# Altium PCB 2015_CONNECTEUR_BALISE.PcbDoc
Units mil, origin at the board's own origin, x right, y up, seen from the top; angles counter-clockwise.
Board outline 900 x 885 mil, 4 copper layers (1-TOP, 2-SIGNAL, 3-GND, 4-BOT), stack 68 mil thick; 7 components, 6 nets, 12 pads, 17 vias.
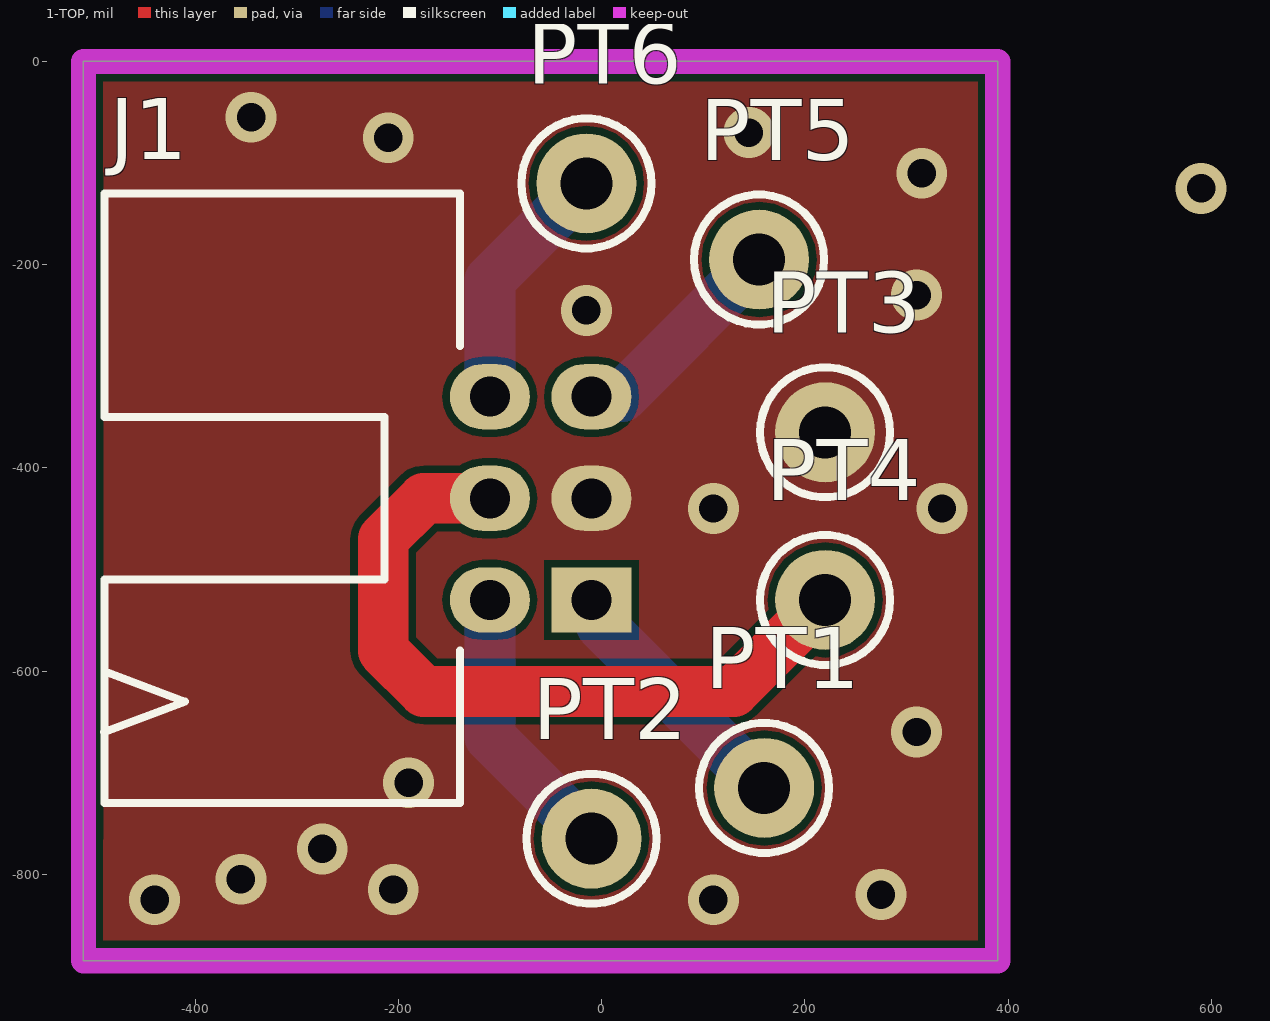
[diagram p0: 1-TOP view]
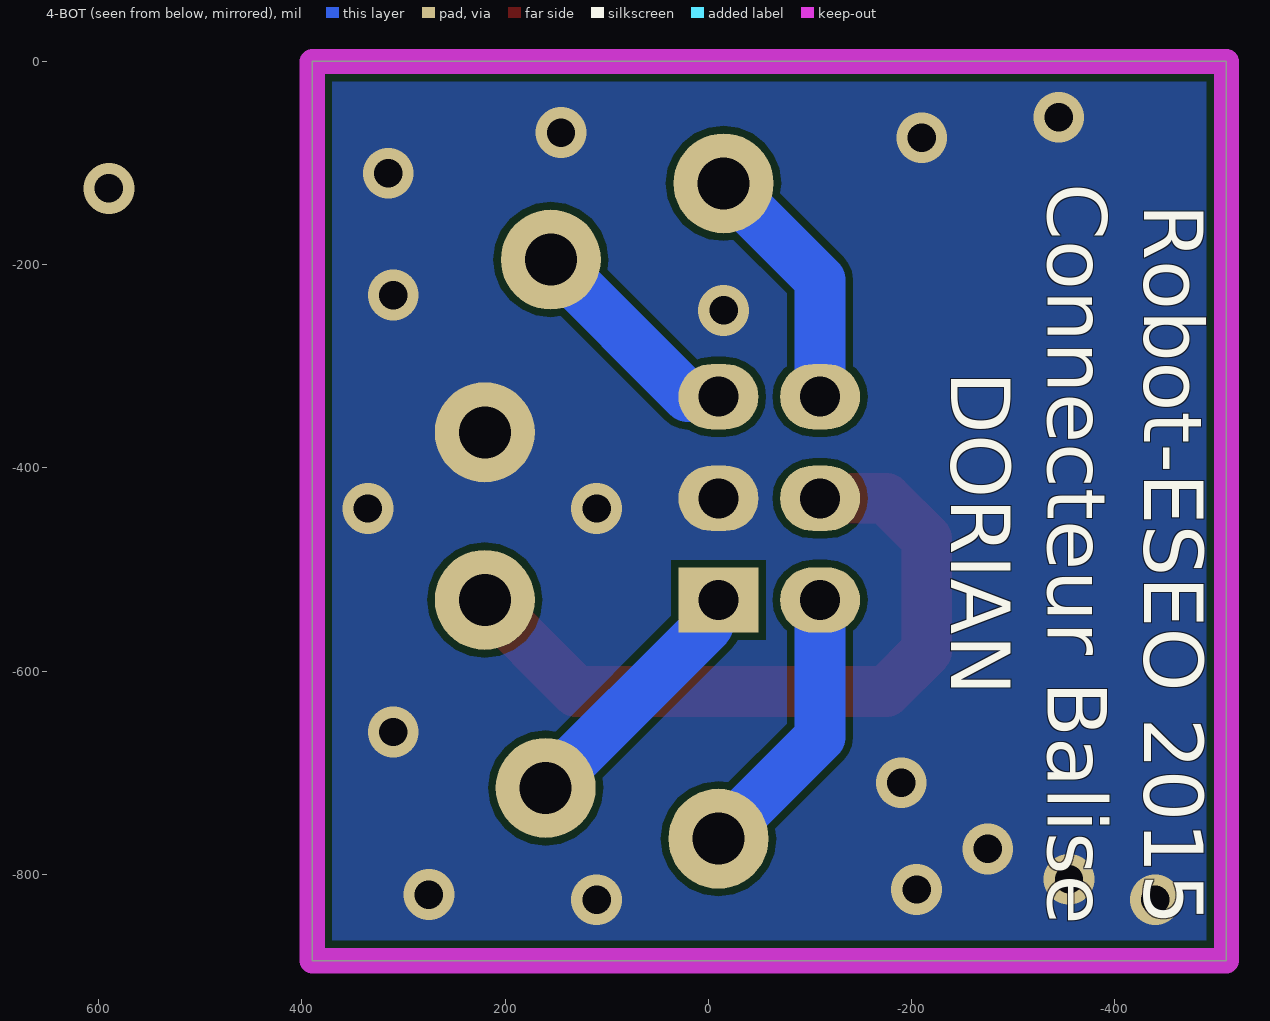
[diagram p1: 4-BOT view, seen from below]
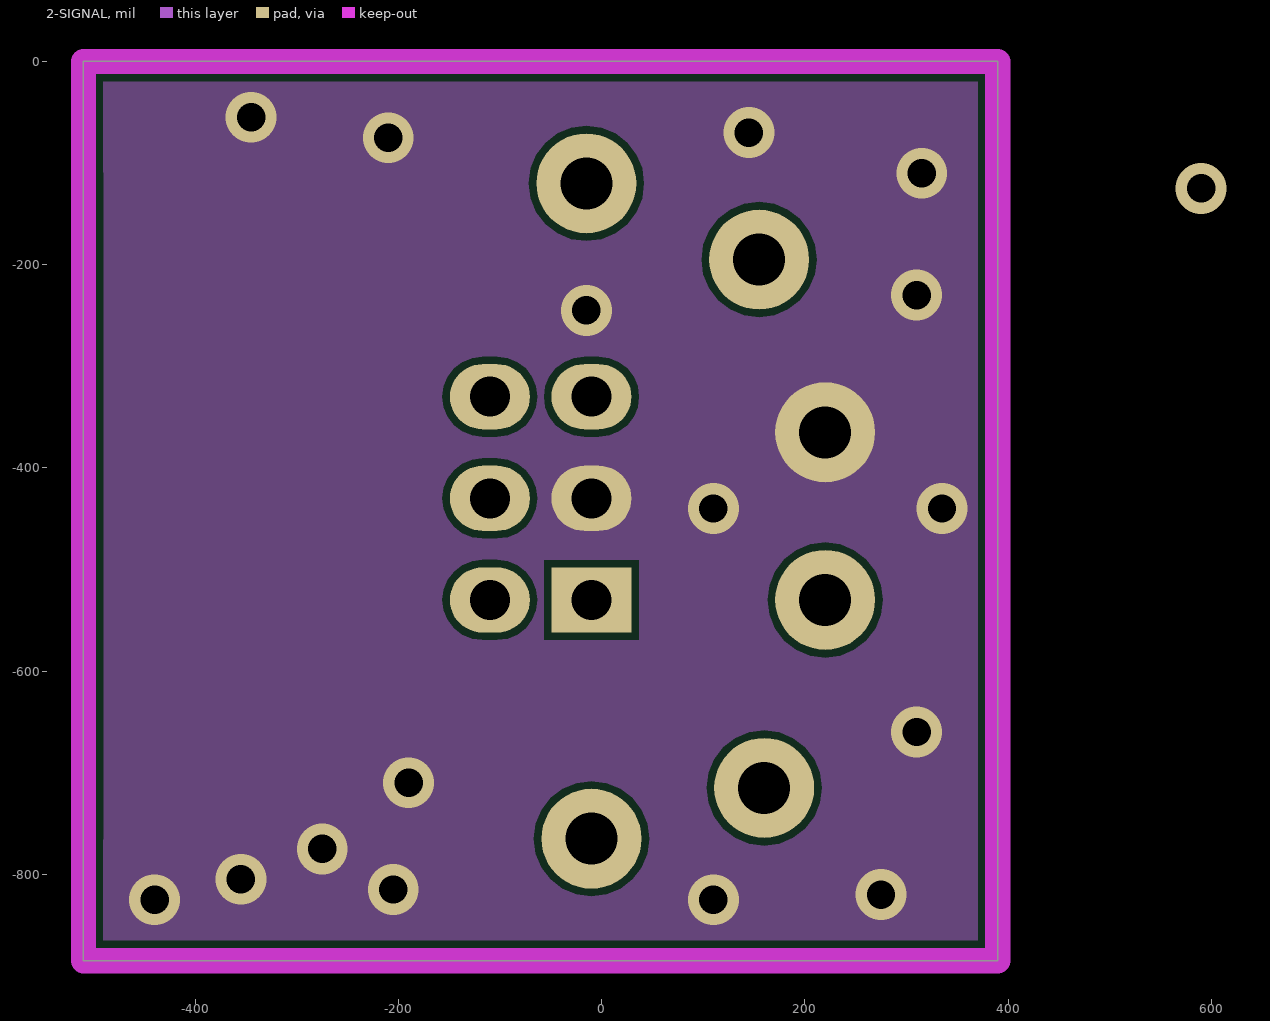
[diagram p2: 2-SIGNAL]
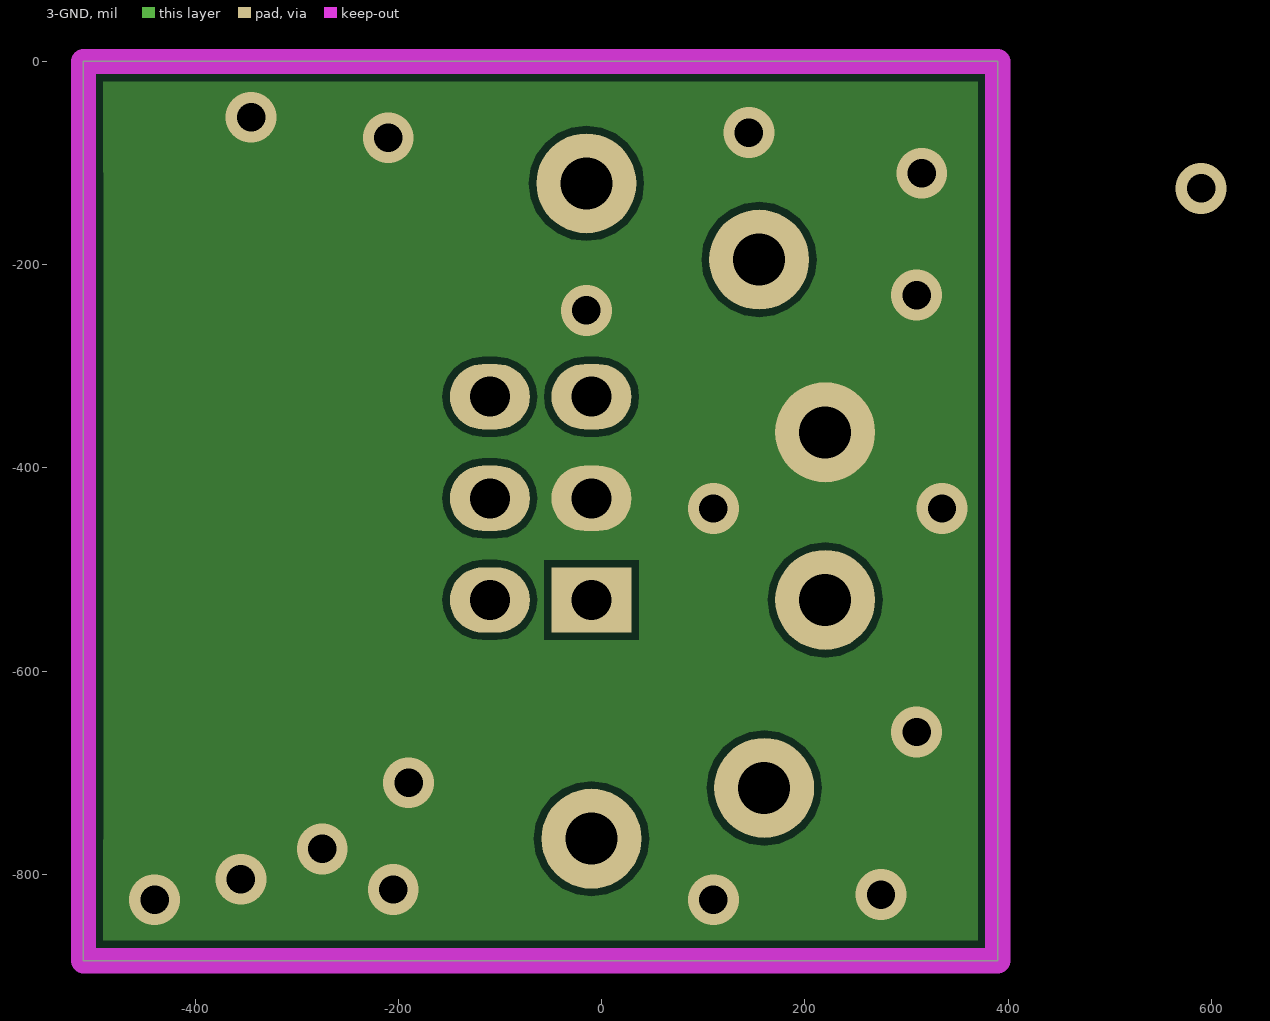
[diagram p3: 3-GND]

## Layer stack, top to bottom
1-TOP: signal copper 1.4
Dielectric: core 20.8, FR-4, Dk 4.8
2-SIGNAL: signal copper 1.4
Dielectric: prepreg 20.8, FR-4, Dk 4.8
3-GND: signal copper 1.4
Dielectric: core 20.8, FR-4, Dk 4.8
4-BOT: signal copper 1.4

## Board outline
-510,-885 390,-885 390,0 -510,0

## Design rules (kind name [scope] priority, off if disabled: settings)
Clearance Clearance_4 [InNamedPolygon('GND_TOP') Or  InNamedPolygon('3-GND') Or  InNamedPolygon('2-GND') Or  InNamedPolygon('4-GND')] p1: gap=15
Clearance Clearance_3 [InNamedPolygon('4-GND') Or  InNamedPolygon('GND_TOP') Or  InNamedPolygon('2-GND') Or  InNamedPolygon('3-GND')] p2: gap=10
Clearance Clearance_2 [InNamedPolygon('4-GND') Or  InNamedPolygon('2-GND') Or  InNamedPolygon('3-GND') Or  InNamedPolygon('1-GND') Or  InNamedPolygon('2-GND24')] p3: gap=10
Clearance Clearance_1 [InNamedPolygon('2-GND') Or  InNamedPolygon('3-GND') Or  InNamedPolygon('1-GND') Or  InNamedPolygon('4-GND')] p4: gap=10
Clearance [All] p5: gap=7
FabricationTestpoint [(IsPad And (OnTopLayer Or OnBottomLayer))] p1: side=3 testpointundercomponent=TRUE minsize=40 maxsize=100 preferedsize=60 minholesize=0 maxholesize=40 preferedholesize=32 testpointgrid=1 allowsidetop=TRUE allowsidebottom=TRUE usegrid=TRUE gridtolerance=0.01
HoleSize [All] p1: absolutevalues=TRUE maxlimit=200 minlimit=1 maxpercent=80.000 minpercent=20.000
PlaneConnect [All] p1: planeconnectstyle=Direct reliefexpansion=20 reliefentries=4 reliefconductorwidth=10 reliefairgap=10
PolygonConnect [All] p1: connectstyle=Direct reliefconductorwidth=10 reliefentries=4 polygonreliefangle="90 Angle"
RoomDefinition 2015_CONNECTEUR_BALISE [InComponentClass('2015_CONNECTEUR_BALISE')] p1: confinementstyle=ConfineIn formatcopy=TRUE lockcomponents=FALSE outline 420,-860 2425,-860 2425,-220 420,-220
RoutingVias [All] p1: holewidth=28 width=50 viastyle="Through Hole" minholewidth=28 minwidth=50 maxholewidth=28 maxwidth=50
SilkscreenOverComponentPads [IsPad] p1: minsilkscreentomaskgap=10
SolderMaskExpansion [All] p1: expansion=4
Width [All] p1: maxlimit=200 minlimit=10 preferedwidth=15
24 further rules are at their usual default settings.

## Components (designator, comment, footprint, x,y, rotation, side; value= is the part's Value field where it differs from the comment)
J1 "HE10/6_MALE_COUDE" HE10/6_M_C -10,-530 r90 top
PT1 "POINT_TEST" POINT_TEST 160,-715 r0 top
PT2 "POINT_TEST" POINT_TEST -10,-765 r0 top
PT3 "POINT_TEST" POINT_TEST 220,-365 r0 top
PT4 "POINT_TEST" POINT_TEST 220,-530 r0 top
PT5 "POINT_TEST" POINT_TEST 155,-195 r0 top
PT6 "POINT_TEST" POINT_TEST -15,-120 r0 top

## Footprints (in the part's own frame and the unit in brackets; to place one, negate y for a bottom-side part, rotate by r counter-clockwise, add the part's x,y. Pads: shape width x height; smd on the part's side, far side on the other; paste and mask are expansions set on the pad)
HE10/6_M_C [mm] "HE10 ; 6 CONTACTS ; MALE ; COUDE ; ESPACEMENTS BROCHES = 2.54 mm"
  rect 1.63x2 hole 1: 1(0,0)
  oval 1.63x2 hole 1: 2(0,2.54) 3(2.54,0) 4(2.54,2.54) 5(5.08,0) 6(5.08,2.54)
  silkscreen extent -5.08,3.29 10.16,12.19
POINT_TEST [mm] "PASTILLE TRAVERSANTE ; DIAMETRE = 2.5 mm ; DIAMETRE PERCAGE = 1.3 mm"
  round 2.5 hole 1.3: 1(0,0)
  silkscreen extent -1.63,-1.62 1.63,1.62, body extent -1.24,-1.27 1.3,1.27, height 5.94

## Part data
J1: "EMBASE HE10/6 MALE COUDE"
PT1 PT2 PT3 PT4 PT5 PT6: "POINT TEST"

## Via types
v1: diameter 50, hole 28, 1-TOP to 4-BOT, 17 vias

## Nets (pads, with @x,y where several pads share a name; then routed paths per layer and width w, separated by ;. In a path a pad name is that pad's centre, name@x,y a point inside that pad or via, vN(x,y) a via of type N, cw(c..) or ccw(c..) an arc to the next point about the centre after c; other vN are vias at no path point)
GND: J1.3 PT3.1
  other v1: -440,-825 110,-825 275,-820 -205,-815 -355,-805 -275,-775 -190,-710 310,-660 110,-440 335,-440 310,-230 315,-110 -210,-75 145,-70 -345,-55
NetJ1_1: J1.1 PT1.1 | length 251.3
  4-BOT w50: J1.1@0,-530 0,-555 PT1.1
NetJ1_2: J1.2 PT2.1 | length 281.4
  4-BOT w50: J1.2@-110,-525 J1.2 -110,-665 PT2.1
NetJ1_4: J1.4 PT4.1 | length 720.4
  1-TOP w50: J1.4 -175,-430 -215,-470 -215,-580 -175,-620 130,-620 PT4.1
NetJ1_5: J1.5 PT5.1 | length 225.9
  4-BOT w50: J1.5@-15,-330 J1.5 20,-330 PT5.1
NetJ1_6: J1.6 PT6.1 | length 244.4
  4-BOT w50: J1.6@-110,-325 -110,-215 PT6.1
copper on no net:
  other v1: -15,-245 590,-125

## Polygon pours and split planes (outlines as drawn)
GND on 1-TOP "1-TOP-No Net" (solid, pour order 9): -510,-885 390,-885 390,0 -510,0
GND on 2-SIGNAL "1-TOP-No Net1" (solid, pour order 14): -510,-885 390,-885 390,0 -510,0
GND on 3-GND "1-TOP-No Net2" (solid, pour order 16): -510,-885 390,-885 390,0 -510,0
GND on 4-BOT "1-TOP-No Net3" (solid, pour order 18): -510,-885 390,-885 390,0 -510,0

## Keep-outs
Keep-Out Layer:
  lines w24.61: -510,-885 -510,-765 ; -510,-110 -510,0
  lines w25: -510,-885 390,-885 390,0 -510,0 ; -510,-765 -510,-110

## Silkscreen, mask and mechanical layers (free items; w line width, h text height)
Bottom Overlay:
  text "Connecteur Balise" at -315,-120 h100 r90
  text "Robot-ESEO 2015" at -410,-140 h100 r90
  text "DORIAN" at -220,-305 h100 r90